# EAGLE board XBee-Explorer-Dongle-GiantPanel-v22 (EAGLE 6.5.0), part 1 of 4
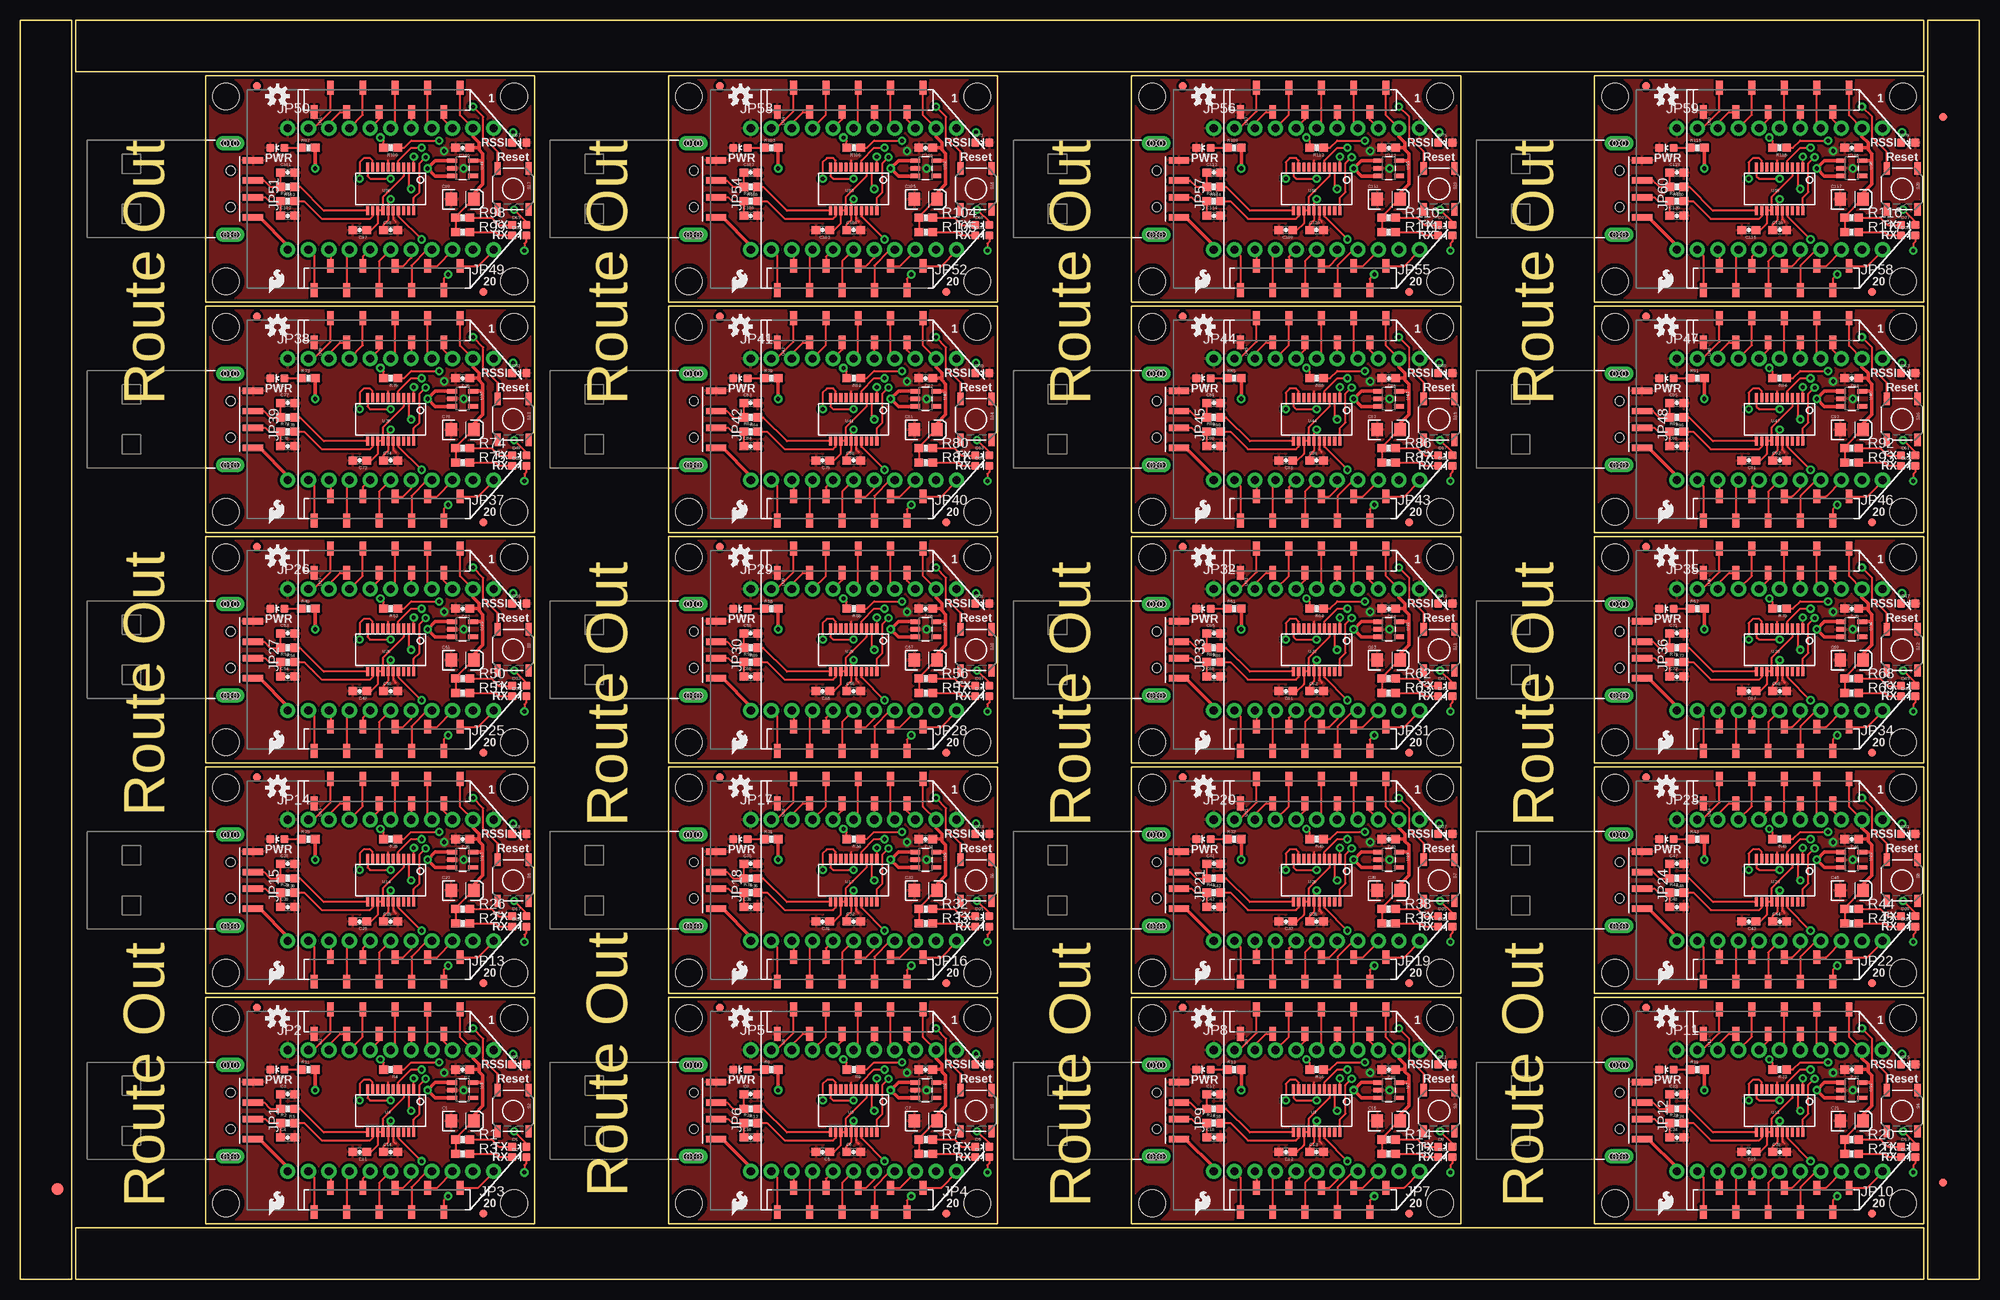
[diagram p0: board, top side]
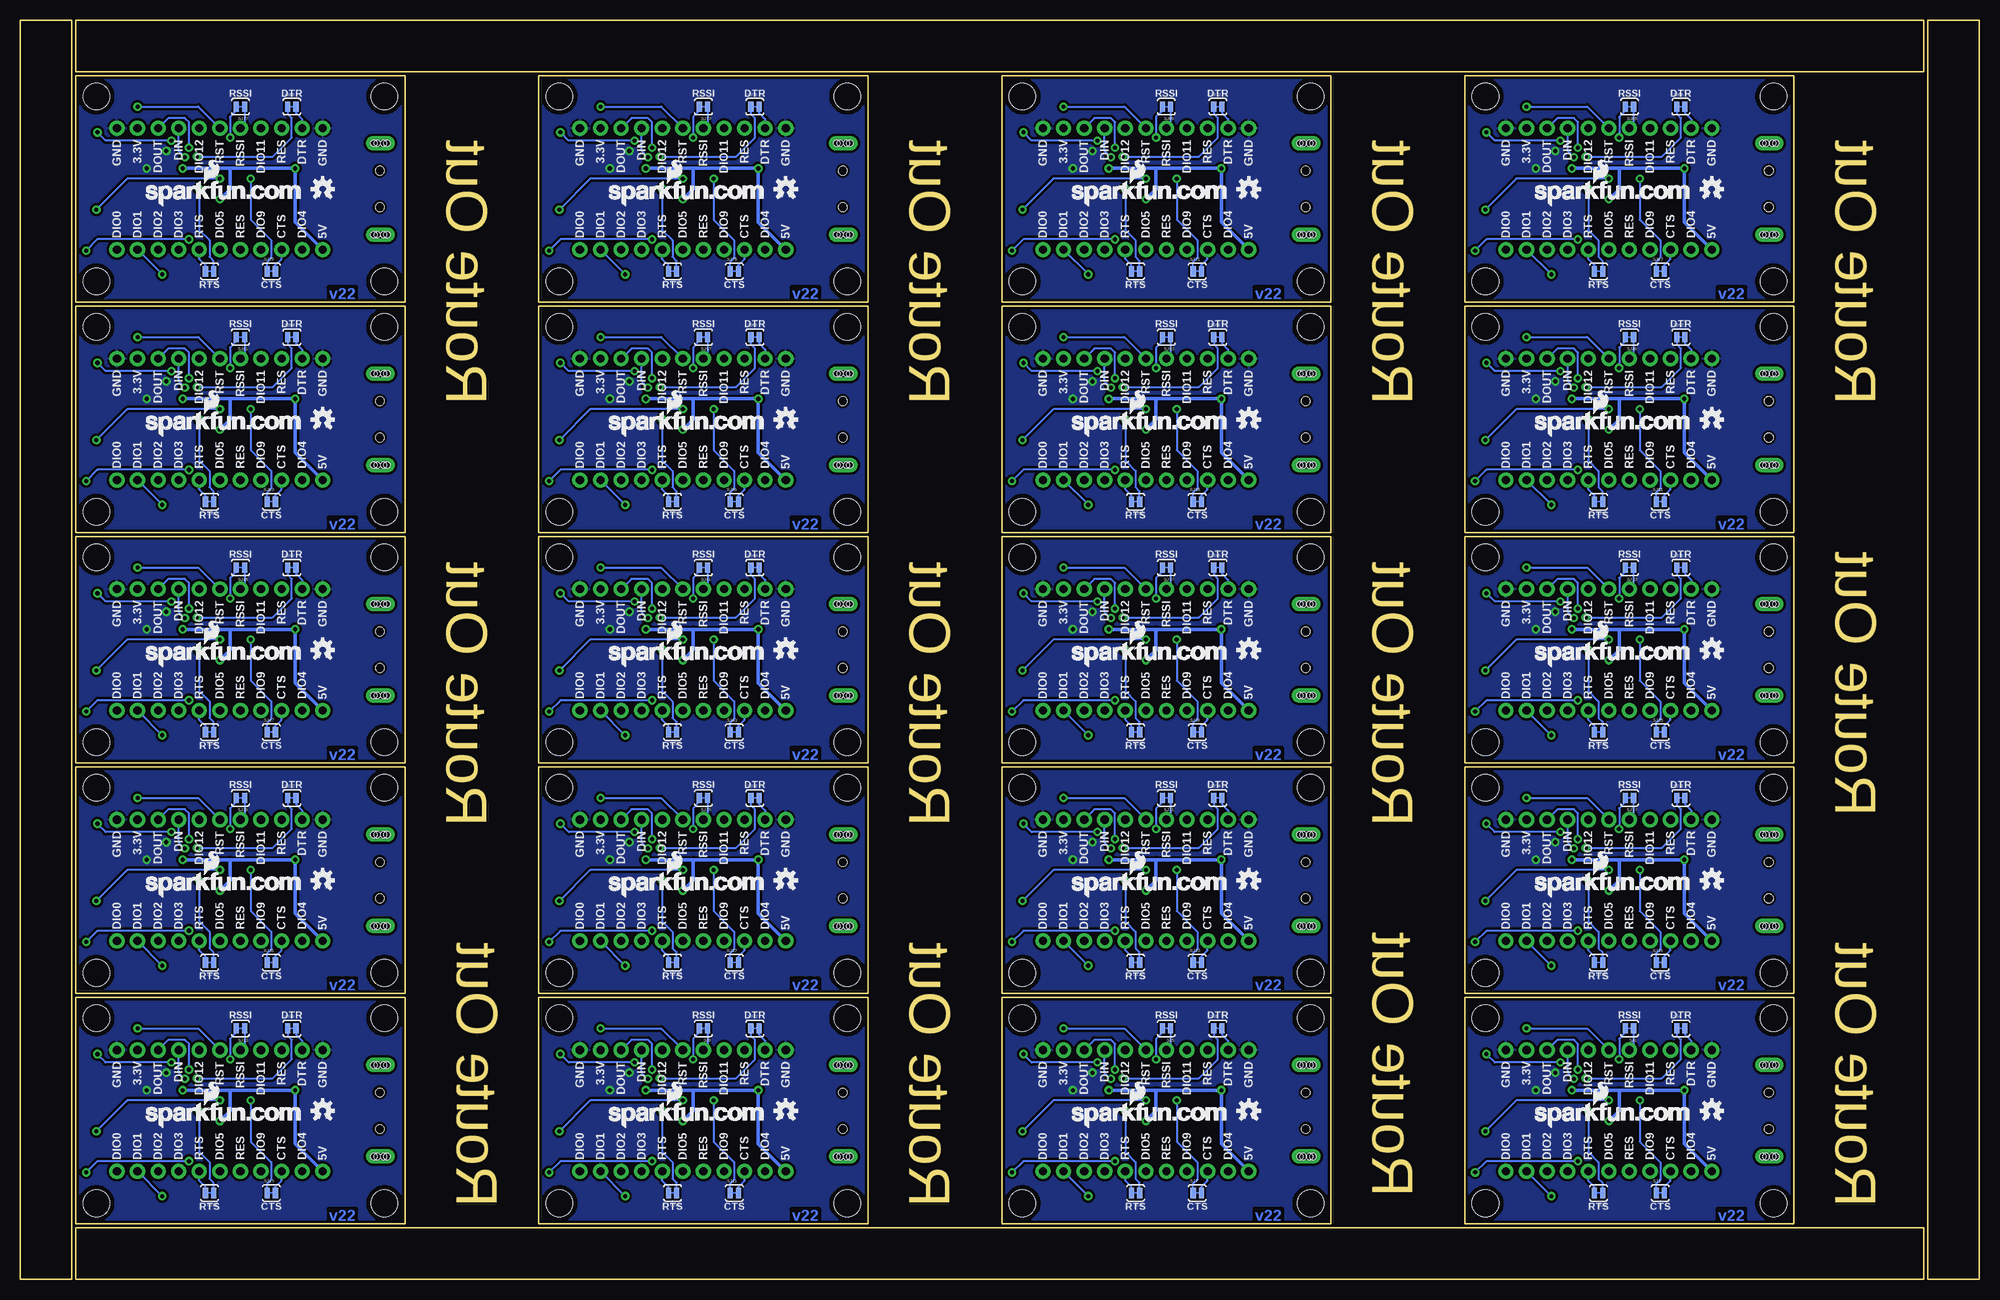
[diagram p1: board, bottom side, seen from below]

Size 241.81 x 155.45 mm. Coordinates in mm from the lower left corner, seen from the top.
Outline: 63.5,6.86 63.5,34.8 22.86,34.8 22.86,6.86 63.5,6.86
Outline: 120.65,6.86 120.65,34.8 80.01,34.8 80.01,6.86 120.65,6.86
Outline: 177.8,6.86 177.8,34.8 137.16,34.8 137.16,6.86 177.8,6.86
Outline: 234.95,6.86 234.95,34.8 194.31,34.8 194.31,6.86 234.95,6.86
Outline: 63.5,35.31 63.5,63.25 22.86,63.25 22.86,35.31 63.5,35.31
Outline: 120.65,35.31 120.65,63.25 80.01,63.25 80.01,35.31 120.65,35.31
Outline: 177.8,35.31 177.8,63.25 137.16,63.25 137.16,35.31 177.8,35.31
Outline: 234.95,35.31 234.95,63.25 194.31,63.25 194.31,35.31 234.95,35.31
Outline: 63.5,63.75 63.5,91.69 22.86,91.69 22.86,63.75 63.5,63.75
Outline: 120.65,63.75 120.65,91.69 80.01,91.69 80.01,63.75 120.65,63.75
Outline: 177.8,63.75 177.8,91.69 137.16,91.69 137.16,63.75 177.8,63.75
Outline: 234.95,63.75 234.95,91.69 194.31,91.69 194.31,63.75 234.95,63.75
Outline: 63.5,92.2 63.5,120.14 22.86,120.14 22.86,92.2 63.5,92.2
Outline: 120.65,92.2 120.65,120.14 80.01,120.14 80.01,92.2 120.65,92.2
Outline: 177.8,92.2 177.8,120.14 137.16,120.14 137.16,92.2 177.8,92.2
Outline: 234.95,92.2 234.95,120.14 194.31,120.14 194.31,92.2 234.95,92.2
Outline: 63.5,120.65 63.5,148.59 22.86,148.59 22.86,120.65 63.5,120.65
Outline: 120.65,120.65 120.65,148.59 80.01,148.59 80.01,120.65 120.65,120.65
Outline: 177.8,120.65 177.8,148.59 137.16,148.59 137.16,120.65 177.8,120.65
Outline: 234.95,120.65 234.95,148.59 194.31,148.59 194.31,120.65 234.95,120.65
Outline: 6.35,0 6.35,155.45 0,155.45 0,0 6.35,0
Outline: 6.86,149.1 234.95,149.1 234.95,155.45 6.86,155.45 6.86,149.1
Outline: 6.86,6.35 6.86,0 234.95,0 234.95,6.35 6.86,6.35
Outline: 235.46,0 241.81,0 241.81,155.45 235.46,155.45 235.46,0
Copper layers (1*16): Top 0.035mm / dielectric 1.5mm / Bottom 0.035mm
Design rules "SparkFun-2-layer": minimum track width 7mil, minimum drill 15mil, track to track 8mil, track to pad 8mil, pad to pad 8mil, via to via 8mil, smd to smd 8mil, copper to edge 8mil, drill to drill 8mil, minimum pad ring 12mil, minimum via ring 10mil, stop-mask expansion 4mil, vias tented up to drill 20mil, thermal gap 10mil
Net classes: 0 default: width 0.203 mm; 1 vcc: width 0.254 mm; 2 gnd: width 0.254 mm

## Footprints (pad centres in the part's own frame; a part is rotated, then mirrored left to right if it is on the bottom)
EIA3216 = smd 1.4 x 1.6: A 1.4,0; C -1.4,0
0603-CAP = smd 1.1 x 1: 1 -0.85,0; 2 0.85,0
LED-0603 = smd 1 x 1: A 0,-0.877; C 0,0.877
FIDUCIAL-1.5X3 = smd 1.5 x 1.5: 1 0,0
FIDUCIAL-1X2 = smd 1 x 1: 1 0,0
USB-A-SMT-MALE-LOCKING = smd 0.8 x 2.5: D+1 1.027,-5.87; D-1 -1.027,-5.87; GND1 3.551,-5.87; VBUS1 -3.5,-5.87 | drill 0.8 pad 1.778 long: P$1 5.647,-3.05; P$3 -5.647,-3.05 | hole 1.1: 2.25,-3.12; -2.25,-3.12 | hole 0.8: -5.647,-3.45; -5.647,-3.85; -5.647,-2.65; -5.647,-2.25; 5.647,-3.45; 5.647,-3.85; 5.647,-2.65; 5.647,-2.25
1X11_NO_SILK = drill 1.016 pad 1.88: 1 0,0; 2 2.54,0; 3 5.08,0; 4 7.62,0; 5 10.16,0; 6 12.7,0; 7 15.24,0; 8 17.78,0; 9 20.32,0; 10 22.86,0; 11 25.4,0
0603-RES = smd 1.1 x 1: 1 -0.85,0; 2 0.85,0
TACTILE_SWITCH_SMD = smd 1.524 x 0.762: 1 -2.54,1.905; 2 2.54,1.905; 3 -2.54,-1.905; 4 2.54,-1.905
SJ_2S-TRACE = smd 0.635 x 1.27: 1 -0.508,0; 2 0.508,0
SOT23-5 = smd 0.55 x 1.2: 1 -0.95,-1.3; 2 0,-1.3; 3 0.95,-1.3; 4 0.95,1.3; 5 -0.95,1.3
XBEE-SMD = smd 1.7 x 0.85: 1 -12.5,20; 2 -9.5,18; 3 -12.5,16; 4 -9.5,14; 5 -12.5,12; 6 -9.5,10; 7 -12.5,8; 8 -9.5,6; 9 -12.5,4; 10 -9.5,2; 11 12.5,2; 12 9.5,4; 13 12.5,6; 14 9.5,8; 15 12.5,10; 16 9.5,12; 17 12.5,14; 18 9.5,16; 19 12.5,18; 20 9.5,20
SSOP20_L = smd 0.381 x 1.143: 1 -2.857,-2.68; 2 -2.223,-2.68; 3 -1.587,-2.68; 4 -0.953,-2.68; 5 -0.318,-2.68; 6 0.318,-2.68; 7 0.953,-2.68; 8 1.587,-2.68; 9 2.223,-2.68; 10 2.857,-2.68; 11 2.857,2.68; 12 2.223,2.68; 13 1.587,2.68; 14 0.953,2.68; 15 0.318,2.68; 16 -0.318,2.68; 17 -0.953,2.68; 18 -1.587,2.68; 19 -2.223,2.68; 20 -2.857,2.68
STAND-OFF = hole 3.302: 0,0

## Placement (x,y rotation side)
C1  10uF  [EIA3216]  54.61,19.56 0 top
C2  0.1uF  [0603-CAP]  54.61,25.91 180 top
C3  47pF  [0603-CAP]  33.02,22.86 0 top
C4  47pF  [0603-CAP]  33.02,17.53 0 top
C5  0.1uF  [0603-CAP]  99.06,15.75 180 top
C6  0.1uF  [0603-CAP]  102.87,15.75 0 top
C7  10uF  [EIA3216]  111.76,19.56 0 top
C8  0.1uF  [0603-CAP]  111.76,25.91 180 top
C9  47pF  [0603-CAP]  90.17,22.86 0 top
C10  47pF  [0603-CAP]  90.17,17.53 0 top
C11  0.1uF  [0603-CAP]  41.91,15.75 180 top
C12  0.1uF  [0603-CAP]  156.21,15.75 180 top
C13  0.1uF  [0603-CAP]  160.02,15.75 0 top
C14  0.1uF  [0603-CAP]  45.72,15.75 0 top
C15  10uF  [EIA3216]  168.91,19.56 0 top
C16  0.1uF  [0603-CAP]  168.91,25.91 180 top
C17  47pF  [0603-CAP]  147.32,22.86 0 top
C18  47pF  [0603-CAP]  147.32,17.53 0 top
C19  0.1uF  [0603-CAP]  213.36,15.75 180 top
C20  0.1uF  [0603-CAP]  217.17,15.75 0 top
C21  10uF  [EIA3216]  226.06,19.56 0 top
C22  0.1uF  [0603-CAP]  226.06,25.91 180 top
C23  47pF  [0603-CAP]  204.47,22.86 0 top
C24  47pF  [0603-CAP]  204.47,17.53 0 top
C25  0.1uF  [0603-CAP]  41.91,44.2 180 top
C26  0.1uF  [0603-CAP]  45.72,44.2 0 top
C27  10uF  [EIA3216]  54.61,48.01 0 top
C28  0.1uF  [0603-CAP]  54.61,54.36 180 top
C29  47pF  [0603-CAP]  33.02,51.31 0 top
C30  47pF  [0603-CAP]  33.02,45.97 0 top
C31  0.1uF  [0603-CAP]  99.06,44.2 180 top
C32  0.1uF  [0603-CAP]  102.87,44.2 0 top
C33  10uF  [EIA3216]  111.76,48.01 0 top
C34  0.1uF  [0603-CAP]  111.76,54.36 180 top
C35  47pF  [0603-CAP]  90.17,51.31 0 top
C36  47pF  [0603-CAP]  90.17,45.97 0 top
C37  0.1uF  [0603-CAP]  156.21,44.2 180 top
C38  0.1uF  [0603-CAP]  160.02,44.2 0 top
C39  10uF  [EIA3216]  168.91,48.01 0 top
C40  0.1uF  [0603-CAP]  168.91,54.36 180 top
C41  47pF  [0603-CAP]  147.32,51.31 0 top
C42  47pF  [0603-CAP]  147.32,45.97 0 top
C43  0.1uF  [0603-CAP]  213.36,44.2 180 top
C44  0.1uF  [0603-CAP]  217.17,44.2 0 top
C45  10uF  [EIA3216]  226.06,48.01 0 top
C46  0.1uF  [0603-CAP]  226.06,54.36 180 top
C47  47pF  [0603-CAP]  204.47,51.31 0 top
C48  47pF  [0603-CAP]  204.47,45.97 0 top
C49  0.1uF  [0603-CAP]  41.91,72.64 180 top
C50  0.1uF  [0603-CAP]  45.72,72.64 0 top
C51  10uF  [EIA3216]  54.61,76.45 0 top
C52  0.1uF  [0603-CAP]  54.61,82.8 180 top
C53  47pF  [0603-CAP]  33.02,79.76 0 top
C54  47pF  [0603-CAP]  33.02,74.42 0 top
C55  0.1uF  [0603-CAP]  99.06,72.64 180 top
C56  0.1uF  [0603-CAP]  102.87,72.64 0 top
C57  10uF  [EIA3216]  111.76,76.45 0 top
C58  0.1uF  [0603-CAP]  111.76,82.8 180 top
C59  47pF  [0603-CAP]  90.17,79.76 0 top
C60  47pF  [0603-CAP]  90.17,74.42 0 top
C61  0.1uF  [0603-CAP]  156.21,72.64 180 top
C62  0.1uF  [0603-CAP]  160.02,72.64 0 top
C63  10uF  [EIA3216]  168.91,76.45 0 top
C64  0.1uF  [0603-CAP]  168.91,82.8 180 top
C65  47pF  [0603-CAP]  147.32,79.76 0 top
C66  47pF  [0603-CAP]  147.32,74.42 0 top
C67  0.1uF  [0603-CAP]  213.36,72.64 180 top
C68  0.1uF  [0603-CAP]  217.17,72.64 0 top
C69  10uF  [EIA3216]  226.06,76.45 0 top
C70  0.1uF  [0603-CAP]  226.06,82.8 180 top
C71  47pF  [0603-CAP]  204.47,79.76 0 top
C72  47pF  [0603-CAP]  204.47,74.42 0 top
C73  0.1uF  [0603-CAP]  41.91,101.09 180 top
C74  0.1uF  [0603-CAP]  45.72,101.09 0 top
C75  10uF  [EIA3216]  54.61,104.9 0 top
C76  0.1uF  [0603-CAP]  54.61,111.25 180 top
C77  47pF  [0603-CAP]  33.02,108.2 0 top
C78  47pF  [0603-CAP]  33.02,102.87 0 top
C79  0.1uF  [0603-CAP]  99.06,101.09 180 top
C80  0.1uF  [0603-CAP]  102.87,101.09 0 top
C81  10uF  [EIA3216]  111.76,104.9 0 top
C82  0.1uF  [0603-CAP]  111.76,111.25 180 top
C83  47pF  [0603-CAP]  90.17,108.2 0 top
C84  47pF  [0603-CAP]  90.17,102.87 0 top
C85  0.1uF  [0603-CAP]  156.21,101.09 180 top
C86  0.1uF  [0603-CAP]  160.02,101.09 0 top
C87  10uF  [EIA3216]  168.91,104.9 0 top
C88  0.1uF  [0603-CAP]  168.91,111.25 180 top
C89  47pF  [0603-CAP]  147.32,108.2 0 top
C90  47pF  [0603-CAP]  147.32,102.87 0 top
C91  0.1uF  [0603-CAP]  213.36,101.09 180 top
C92  0.1uF  [0603-CAP]  217.17,101.09 0 top
C93  10uF  [EIA3216]  226.06,104.9 0 top
C94  0.1uF  [0603-CAP]  226.06,111.25 180 top
C95  47pF  [0603-CAP]  204.47,108.2 0 top
C96  47pF  [0603-CAP]  204.47,102.87 0 top
C97  0.1uF  [0603-CAP]  41.91,129.54 180 top
C98  0.1uF  [0603-CAP]  45.72,129.54 0 top
C99  10uF  [EIA3216]  54.61,133.35 0 top
C100  0.1uF  [0603-CAP]  54.61,139.7 180 top
C101  47pF  [0603-CAP]  33.02,136.65 0 top
C102  47pF  [0603-CAP]  33.02,131.32 0 top
C103  0.1uF  [0603-CAP]  99.06,129.54 180 top
C104  0.1uF  [0603-CAP]  102.87,129.54 0 top
C105  10uF  [EIA3216]  111.76,133.35 0 top
C106  0.1uF  [0603-CAP]  111.76,139.7 180 top
C107  47pF  [0603-CAP]  90.17,136.65 0 top
C108  47pF  [0603-CAP]  90.17,131.32 0 top
C109  0.1uF  [0603-CAP]  156.21,129.54 180 top
C110  0.1uF  [0603-CAP]  160.02,129.54 0 top
C111  10uF  [EIA3216]  168.91,133.35 0 top
C112  0.1uF  [0603-CAP]  168.91,139.7 180 top
C113  47pF  [0603-CAP]  147.32,136.65 0 top
C114  47pF  [0603-CAP]  147.32,131.32 0 top
C115  0.1uF  [0603-CAP]  213.36,129.54 180 top
C116  0.1uF  [0603-CAP]  217.17,129.54 0 top
C117  10uF  [EIA3216]  226.06,133.35 0 top
C118  0.1uF  [0603-CAP]  226.06,139.7 180 top
C119  47pF  [0603-CAP]  204.47,136.65 0 top
C120  47pF  [0603-CAP]  204.47,131.32 0 top
D1  RED  [LED-0603]  61.59,16.38 270 top
D2  GREEN  [LED-0603]  61.59,15.11 270 top
D3  GREEN  [LED-0603]  61.59,26.54 270 top
D4  RED  [LED-0603]  31.75,25.91 90 top
D5  RED  [LED-0603]  118.75,16.38 270 top
D6  GREEN  [LED-0603]  118.75,15.11 270 top
D7  GREEN  [LED-0603]  118.75,26.54 270 top
D8  RED  [LED-0603]  88.9,25.91 90 top
D9  RED  [LED-0603]  175.9,16.38 270 top
D10  GREEN  [LED-0603]  175.9,15.11 270 top
D11  GREEN  [LED-0603]  175.9,26.54 270 top
D12  RED  [LED-0603]  146.05,25.91 90 top
D13  RED  [LED-0603]  233.04,16.38 270 top
D14  GREEN  [LED-0603]  233.04,15.11 270 top
D15  GREEN  [LED-0603]  233.04,26.54 270 top
D16  RED  [LED-0603]  203.2,25.91 90 top
D17  RED  [LED-0603]  61.59,44.83 270 top
D18  GREEN  [LED-0603]  61.59,43.56 270 top
D19  GREEN  [LED-0603]  61.59,54.99 270 top
D20  RED  [LED-0603]  31.75,54.36 90 top
D21  RED  [LED-0603]  118.75,44.83 270 top
D22  GREEN  [LED-0603]  118.75,43.56 270 top
D23  GREEN  [LED-0603]  118.75,54.99 270 top
D24  RED  [LED-0603]  88.9,54.36 90 top
D25  RED  [LED-0603]  175.9,44.83 270 top
D26  GREEN  [LED-0603]  175.9,43.56 270 top
D27  GREEN  [LED-0603]  175.9,54.99 270 top
D28  RED  [LED-0603]  146.05,54.36 90 top
D29  RED  [LED-0603]  233.04,44.83 270 top
D30  GREEN  [LED-0603]  233.04,43.56 270 top
D31  GREEN  [LED-0603]  233.04,54.99 270 top
D32  RED  [LED-0603]  203.2,54.36 90 top
D33  RED  [LED-0603]  61.59,73.28 270 top
D34  GREEN  [LED-0603]  61.59,72.01 270 top
D35  GREEN  [LED-0603]  61.59,83.44 270 top
D36  RED  [LED-0603]  31.75,82.8 90 top
D37  RED  [LED-0603]  118.75,73.28 270 top
D38  GREEN  [LED-0603]  118.75,72.01 270 top
D39  GREEN  [LED-0603]  118.75,83.44 270 top
D40  RED  [LED-0603]  88.9,82.8 90 top
D41  RED  [LED-0603]  175.9,73.28 270 top
D42  GREEN  [LED-0603]  175.9,72.01 270 top
D43  GREEN  [LED-0603]  175.9,83.44 270 top
D44  RED  [LED-0603]  146.05,82.8 90 top
D45  RED  [LED-0603]  233.04,73.28 270 top
D46  GREEN  [LED-0603]  233.04,72.01 270 top
D47  GREEN  [LED-0603]  233.04,83.44 270 top
D48  RED  [LED-0603]  203.2,82.8 90 top
D49  RED  [LED-0603]  61.59,101.73 270 top
D50  GREEN  [LED-0603]  61.59,100.46 270 top
D51  GREEN  [LED-0603]  61.59,111.89 270 top
D52  RED  [LED-0603]  31.75,111.25 90 top
D53  RED  [LED-0603]  118.75,101.73 270 top
D54  GREEN  [LED-0603]  118.75,100.46 270 top
D55  GREEN  [LED-0603]  118.75,111.89 270 top
D56  RED  [LED-0603]  88.9,111.25 90 top
D57  RED  [LED-0603]  175.9,101.73 270 top
D58  GREEN  [LED-0603]  175.9,100.46 270 top
D59  GREEN  [LED-0603]  175.9,111.89 270 top
D60  RED  [LED-0603]  146.05,111.25 90 top
D61  RED  [LED-0603]  233.04,101.73 270 top
D62  GREEN  [LED-0603]  233.04,100.46 270 top
D63  GREEN  [LED-0603]  233.04,111.89 270 top
D64  RED  [LED-0603]  203.2,111.25 90 top
D65  RED  [LED-0603]  61.59,130.18 270 top
D66  GREEN  [LED-0603]  61.59,128.91 270 top
D67  GREEN  [LED-0603]  61.59,140.34 270 top
D68  RED  [LED-0603]  31.75,139.7 90 top
D69  RED  [LED-0603]  118.75,130.18 270 top
D70  GREEN  [LED-0603]  118.75,128.91 270 top
D71  GREEN  [LED-0603]  118.75,140.34 270 top
D72  RED  [LED-0603]  88.9,139.7 90 top
D73  RED  [LED-0603]  175.9,130.18 270 top
D74  GREEN  [LED-0603]  175.9,128.91 270 top
D75  GREEN  [LED-0603]  175.9,140.34 270 top
D76  RED  [LED-0603]  146.05,139.7 90 top
D77  RED  [LED-0603]  233.04,130.18 270 top
D78  GREEN  [LED-0603]  233.04,128.91 270 top
D79  GREEN  [LED-0603]  233.04,140.34 270 top
D80  RED  [LED-0603]  203.2,139.7 90 top
E$1  [FIDUCIAL-1.5X3]  4.57,11.18 0 top
E$6  [FIDUCIAL-1X2]  237.36,11.94 0 top
E$8  [FIDUCIAL-1X2]  237.36,143.51 180 top
FID1  FIDUCIAL1X2  [FIDUCIAL-1X2]  29.21,33.53 0 top
FID2  FIDUCIAL1X2  [FIDUCIAL-1X2]  57.15,8.13 0 top
FID3  FIDUCIAL1X2  [FIDUCIAL-1X2]  86.36,33.53 0 top
FID4  FIDUCIAL1X2  [FIDUCIAL-1X2]  114.3,8.13 0 top
FID5  FIDUCIAL1X2  [FIDUCIAL-1X2]  143.51,33.53 0 top
FID6  FIDUCIAL1X2  [FIDUCIAL-1X2]  171.45,8.13 0 top
FID7  FIDUCIAL1X2  [FIDUCIAL-1X2]  200.66,33.53 0 top
FID8  FIDUCIAL1X2  [FIDUCIAL-1X2]  228.6,8.13 0 top
FID9  FIDUCIAL1X2  [FIDUCIAL-1X2]  29.21,61.98 0 top
FID10  FIDUCIAL1X2  [FIDUCIAL-1X2]  57.15,36.58 0 top
FID11  FIDUCIAL1X2  [FIDUCIAL-1X2]  86.36,61.98 0 top
FID12  FIDUCIAL1X2  [FIDUCIAL-1X2]  114.3,36.58 0 top
FID13  FIDUCIAL1X2  [FIDUCIAL-1X2]  143.51,61.98 0 top
FID14  FIDUCIAL1X2  [FIDUCIAL-1X2]  171.45,36.58 0 top
FID15  FIDUCIAL1X2  [FIDUCIAL-1X2]  200.66,61.98 0 top
FID16  FIDUCIAL1X2  [FIDUCIAL-1X2]  228.6,36.58 0 top
FID17  FIDUCIAL1X2  [FIDUCIAL-1X2]  29.21,90.42 0 top
FID18  FIDUCIAL1X2  [FIDUCIAL-1X2]  57.15,65.02 0 top
FID19  FIDUCIAL1X2  [FIDUCIAL-1X2]  86.36,90.42 0 top
FID20  FIDUCIAL1X2  [FIDUCIAL-1X2]  114.3,65.02 0 top
FID21  FIDUCIAL1X2  [FIDUCIAL-1X2]  143.51,90.42 0 top
FID22  FIDUCIAL1X2  [FIDUCIAL-1X2]  171.45,65.02 0 top
FID23  FIDUCIAL1X2  [FIDUCIAL-1X2]  200.66,90.42 0 top
FID24  FIDUCIAL1X2  [FIDUCIAL-1X2]  228.6,65.02 0 top
FID25  FIDUCIAL1X2  [FIDUCIAL-1X2]  29.21,118.87 0 top
FID26  FIDUCIAL1X2  [FIDUCIAL-1X2]  57.15,93.47 0 top
FID27  FIDUCIAL1X2  [FIDUCIAL-1X2]  86.36,118.87 0 top
FID28  FIDUCIAL1X2  [FIDUCIAL-1X2]  114.3,93.47 0 top
FID29  FIDUCIAL1X2  [FIDUCIAL-1X2]  143.51,118.87 0 top
FID30  FIDUCIAL1X2  [FIDUCIAL-1X2]  171.45,93.47 0 top
FID31  FIDUCIAL1X2  [FIDUCIAL-1X2]  200.66,118.87 0 top
FID32  FIDUCIAL1X2  [FIDUCIAL-1X2]  228.6,93.47 0 top
FID33  FIDUCIAL1X2  [FIDUCIAL-1X2]  29.21,147.32 0 top
FID34  FIDUCIAL1X2  [FIDUCIAL-1X2]  57.15,121.92 0 top
FID35  FIDUCIAL1X2  [FIDUCIAL-1X2]  86.36,147.32 0 top
FID36  FIDUCIAL1X2  [FIDUCIAL-1X2]  114.3,121.92 0 top
FID37  FIDUCIAL1X2  [FIDUCIAL-1X2]  143.51,147.32 0 top
FID38  FIDUCIAL1X2  [FIDUCIAL-1X2]  171.45,121.92 0 top
FID39  FIDUCIAL1X2  [FIDUCIAL-1X2]  200.66,147.32 0 top
FID40  FIDUCIAL1X2  [FIDUCIAL-1X2]  228.6,121.92 0 top
JP1  USBA-SMD-MALE-LOCKING  [USB-A-SMT-MALE-LOCKING]  22.86,20.83 90 top
JP2  M111X11_NO_SILK  [1X11_NO_SILK]  33.02,28.32 0 top
JP3  M111X11_NO_SILK  [1X11_NO_SILK]  58.42,13.34 180 top
JP4  M111X11_NO_SILK  [1X11_NO_SILK]  115.57,13.34 180 top
JP5  M111X11_NO_SILK  [1X11_NO_SILK]  90.17,28.32 0 top
JP6  USBA-SMD-MALE-LOCKING  [USB-A-SMT-MALE-LOCKING]  80.01,20.83 90 top
JP7  M111X11_NO_SILK  [1X11_NO_SILK]  172.72,13.34 180 top
JP8  M111X11_NO_SILK  [1X11_NO_SILK]  147.32,28.32 0 top
JP9  USBA-SMD-MALE-LOCKING  [USB-A-SMT-MALE-LOCKING]  137.16,20.83 90 top
JP10  M111X11_NO_SILK  [1X11_NO_SILK]  229.87,13.34 180 top
JP11  M111X11_NO_SILK  [1X11_NO_SILK]  204.47,28.32 0 top
JP12  USBA-SMD-MALE-LOCKING  [USB-A-SMT-MALE-LOCKING]  194.31,20.83 90 top
JP13  M111X11_NO_SILK  [1X11_NO_SILK]  58.42,41.78 180 top
JP14  M111X11_NO_SILK  [1X11_NO_SILK]  33.02,56.77 0 top
JP15  USBA-SMD-MALE-LOCKING  [USB-A-SMT-MALE-LOCKING]  22.86,49.28 90 top
JP16  M111X11_NO_SILK  [1X11_NO_SILK]  115.57,41.78 180 top
JP17  M111X11_NO_SILK  [1X11_NO_SILK]  90.17,56.77 0 top
JP18  USBA-SMD-MALE-LOCKING  [USB-A-SMT-MALE-LOCKING]  80.01,49.28 90 top
JP19  M111X11_NO_SILK  [1X11_NO_SILK]  172.72,41.78 180 top
JP20  M111X11_NO_SILK  [1X11_NO_SILK]  147.32,56.77 0 top
JP21  USBA-SMD-MALE-LOCKING  [USB-A-SMT-MALE-LOCKING]  137.16,49.28 90 top
JP22  M111X11_NO_SILK  [1X11_NO_SILK]  229.87,41.78 180 top
JP23  M111X11_NO_SILK  [1X11_NO_SILK]  204.47,56.77 0 top
JP24  USBA-SMD-MALE-LOCKING  [USB-A-SMT-MALE-LOCKING]  194.31,49.28 90 top
JP25  M111X11_NO_SILK  [1X11_NO_SILK]  58.42,70.23 180 top
JP26  M111X11_NO_SILK  [1X11_NO_SILK]  33.02,85.22 0 top
JP27  USBA-SMD-MALE-LOCKING  [USB-A-SMT-MALE-LOCKING]  22.86,77.72 90 top
JP28  M111X11_NO_SILK  [1X11_NO_SILK]  115.57,70.23 180 top
JP29  M111X11_NO_SILK  [1X11_NO_SILK]  90.17,85.22 0 top
JP30  USBA-SMD-MALE-LOCKING  [USB-A-SMT-MALE-LOCKING]  80.01,77.72 90 top
JP31  M111X11_NO_SILK  [1X11_NO_SILK]  172.72,70.23 180 top
JP32  M111X11_NO_SILK  [1X11_NO_SILK]  147.32,85.22 0 top
JP33  USBA-SMD-MALE-LOCKING  [USB-A-SMT-MALE-LOCKING]  137.16,77.72 90 top
JP34  M111X11_NO_SILK  [1X11_NO_SILK]  229.87,70.23 180 top
JP35  M111X11_NO_SILK  [1X11_NO_SILK]  204.47,85.22 0 top
JP36  USBA-SMD-MALE-LOCKING  [USB-A-SMT-MALE-LOCKING]  194.31,77.72 90 top
JP37  M111X11_NO_SILK  [1X11_NO_SILK]  58.42,98.68 180 top
JP38  M111X11_NO_SILK  [1X11_NO_SILK]  33.02,113.67 0 top
JP39  USBA-SMD-MALE-LOCKING  [USB-A-SMT-MALE-LOCKING]  22.86,106.17 90 top
JP40  M111X11_NO_SILK  [1X11_NO_SILK]  115.57,98.68 180 top
JP41  M111X11_NO_SILK  [1X11_NO_SILK]  90.17,113.67 0 top
JP42  USBA-SMD-MALE-LOCKING  [USB-A-SMT-MALE-LOCKING]  80.01,106.17 90 top
JP43  M111X11_NO_SILK  [1X11_NO_SILK]  172.72,98.68 180 top
JP44  M111X11_NO_SILK  [1X11_NO_SILK]  147.32,113.67 0 top
JP45  USBA-SMD-MALE-LOCKING  [USB-A-SMT-MALE-LOCKING]  137.16,106.17 90 top
JP46  M111X11_NO_SILK  [1X11_NO_SILK]  229.87,98.68 180 top
JP47  M111X11_NO_SILK  [1X11_NO_SILK]  204.47,113.67 0 top
JP48  USBA-SMD-MALE-LOCKING  [USB-A-SMT-MALE-LOCKING]  194.31,106.17 90 top
JP49  M111X11_NO_SILK  [1X11_NO_SILK]  58.42,127.13 180 top
JP50  M111X11_NO_SILK  [1X11_NO_SILK]  33.02,142.11 0 top
JP51  USBA-SMD-MALE-LOCKING  [USB-A-SMT-MALE-LOCKING]  22.86,134.62 90 top
JP52  M111X11_NO_SILK  [1X11_NO_SILK]  115.57,127.13 180 top
JP53  M111X11_NO_SILK  [1X11_NO_SILK]  90.17,142.11 0 top
JP54  USBA-SMD-MALE-LOCKING  [USB-A-SMT-MALE-LOCKING]  80.01,134.62 90 top
JP55  M111X11_NO_SILK  [1X11_NO_SILK]  172.72,127.13 180 top
JP56  M111X11_NO_SILK  [1X11_NO_SILK]  147.32,142.11 0 top
JP57  USBA-SMD-MALE-LOCKING  [USB-A-SMT-MALE-LOCKING]  137.16,134.62 90 top
JP58  M111X11_NO_SILK  [1X11_NO_SILK]  229.87,127.13 180 top
JP59  M111X11_NO_SILK  [1X11_NO_SILK]  204.47,142.11 0 top
JP60  USBA-SMD-MALE-LOCKING  [USB-A-SMT-MALE-LOCKING]  194.31,134.62 90 top
R1  1K  [0603-RES]  54.61,17.27 0 top
R2  27  [0603-RES]  33.02,19.3 0 top
R3  1K  [0603-RES]  54.61,15.49 0 top
R4  330  [0603-RES]  45.72,25.91 180 top
R5  27  [0603-RES]  33.02,21.08 180 top
R6  1K  [0603-RES]  92.71,25.91 0 top
R7  1K  [0603-RES]  111.76,17.27 0 top
R8  1K  [0603-RES]  111.76,15.49 0 top
R9  330  [0603-RES]  102.87,25.91 180 top
R10  27  [0603-RES]  90.17,19.3 0 top
R11  1K  [0603-RES]  35.56,25.91 0 top
R12  27  [0603-RES]  90.17,21.08 180 top
R13  1K  [0603-RES]  149.86,25.91 0 top
R14  1K  [0603-RES]  168.91,17.27 0 top
R15  1K  [0603-RES]  168.91,15.49 0 top
R16  330  [0603-RES]  160.02,25.91 180 top
R17  27  [0603-RES]  147.32,19.3 0 top
R18  27  [0603-RES]  147.32,21.08 180 top
R19  1K  [0603-RES]  207.01,25.91 0 top
R20  1K  [0603-RES]  226.06,17.27 0 top
R21  1K  [0603-RES]  226.06,15.49 0 top
R22  330  [0603-RES]  217.17,25.91 180 top
R23  27  [0603-RES]  204.47,19.3 0 top
R24  27  [0603-RES]  204.47,21.08 180 top
R25  1K  [0603-RES]  35.56,54.36 0 top
R26  1K  [0603-RES]  54.61,45.72 0 top
R27  1K  [0603-RES]  54.61,43.94 0 top
R28  330  [0603-RES]  45.72,54.36 180 top
R29  27  [0603-RES]  33.02,47.75 0 top
R30  27  [0603-RES]  33.02,49.53 180 top
R31  1K  [0603-RES]  92.71,54.36 0 top
R32  1K  [0603-RES]  111.76,45.72 0 top
R33  1K  [0603-RES]  111.76,43.94 0 top
R34  330  [0603-RES]  102.87,54.36 180 top
R35  27  [0603-RES]  90.17,47.75 0 top
R36  27  [0603-RES]  90.17,49.53 180 top
R37  1K  [0603-RES]  149.86,54.36 0 top
R38  1K  [0603-RES]  168.91,45.72 0 top
R39  1K  [0603-RES]  168.91,43.94 0 top
R40  330  [0603-RES]  160.02,54.36 180 top
R41  27  [0603-RES]  147.32,47.75 0 top
R42  27  [0603-RES]  147.32,49.53 180 top
R43  1K  [0603-RES]  207.01,54.36 0 top
R44  1K  [0603-RES]  226.06,45.72 0 top
R45  1K  [0603-RES]  226.06,43.94 0 top
R46  330  [0603-RES]  217.17,54.36 180 top
R47  27  [0603-RES]  204.47,47.75 0 top
R48  27  [0603-RES]  204.47,49.53 180 top
R49  1K  [0603-RES]  35.56,82.8 0 top
R50  1K  [0603-RES]  54.61,74.17 0 top
R51  1K  [0603-RES]  54.61,72.39 0 top
R52  330  [0603-RES]  45.72,82.8 180 top
R53  27  [0603-RES]  33.02,76.2 0 top
R54  27  [0603-RES]  33.02,77.98 180 top
R55  1K  [0603-RES]  92.71,82.8 0 top
R56  1K  [0603-RES]  111.76,74.17 0 top
R57  1K  [0603-RES]  111.76,72.39 0 top
R58  330  [0603-RES]  102.87,82.8 180 top
R59  27  [0603-RES]  90.17,76.2 0 top
R60  27  [0603-RES]  90.17,77.98 180 top
R61  1K  [0603-RES]  149.86,82.8 0 top
R62  1K  [0603-RES]  168.91,74.17 0 top
R63  1K  [0603-RES]  168.91,72.39 0 top
R64  330  [0603-RES]  160.02,82.8 180 top
R65  27  [0603-RES]  147.32,76.2 0 top
R66  27  [0603-RES]  147.32,77.98 180 top
R67  1K  [0603-RES]  207.01,82.8 0 top
R68  1K  [0603-RES]  226.06,74.17 0 top
R69  1K  [0603-RES]  226.06,72.39 0 top
R70  330  [0603-RES]  217.17,82.8 180 top
R71  27  [0603-RES]  204.47,76.2 0 top
R72  27  [0603-RES]  204.47,77.98 180 top
R73  1K  [0603-RES]  35.56,111.25 0 top
R74  1K  [0603-RES]  54.61,102.62 0 top
R75  1K  [0603-RES]  54.61,100.84 0 top
R76  330  [0603-RES]  45.72,111.25 180 top
R77  27  [0603-RES]  33.02,104.65 0 top
R78  27  [0603-RES]  33.02,106.43 180 top
R79  1K  [0603-RES]  92.71,111.25 0 top
R80  1K  [0603-RES]  111.76,102.62 0 top
R81  1K  [0603-RES]  111.76,100.84 0 top
R82  330  [0603-RES]  102.87,111.25 180 top
R83  27  [0603-RES]  90.17,104.65 0 top
R84  27  [0603-RES]  90.17,106.43 180 top
R85  1K  [0603-RES]  149.86,111.25 0 top
R86  1K  [0603-RES]  168.91,102.62 0 top
R87  1K  [0603-RES]  168.91,100.84 0 top
R88  330  [0603-RES]  160.02,111.25 180 top
R89  27  [0603-RES]  147.32,104.65 0 top
R90  27  [0603-RES]  147.32,106.43 180 top
R91  1K  [0603-RES]  207.01,111.25 0 top
R92  1K  [0603-RES]  226.06,102.62 0 top
R93  1K  [0603-RES]  226.06,100.84 0 top
R94  330  [0603-RES]  217.17,111.25 180 top
R95  27  [0603-RES]  204.47,104.65 0 top
R96  27  [0603-RES]  204.47,106.43 180 top
R97  1K  [0603-RES]  35.56,139.7 0 top
R98  1K  [0603-RES]  54.61,131.06 0 top
R99  1K  [0603-RES]  54.61,129.29 0 top
R100  330  [0603-RES]  45.72,139.7 180 top
R101  27  [0603-RES]  33.02,133.1 0 top
R102  27  [0603-RES]  33.02,134.87 180 top
R103  1K  [0603-RES]  92.71,139.7 0 top
R104  1K  [0603-RES]  111.76,131.06 0 top
R105  1K  [0603-RES]  111.76,129.29 0 top
R106  330  [0603-RES]  102.87,139.7 180 top
R107  27  [0603-RES]  90.17,133.1 0 top
R108  27  [0603-RES]  90.17,134.87 180 top
R109  1K  [0603-RES]  149.86,139.7 0 top
R110  1K  [0603-RES]  168.91,131.06 0 top
R111  1K  [0603-RES]  168.91,129.29 0 top
R112  330  [0603-RES]  160.02,139.7 180 top
R113  27  [0603-RES]  147.32,133.1 0 top
R114  27  [0603-RES]  147.32,134.87 180 top
R115  1K  [0603-RES]  207.01,139.7 0 top
R116  1K  [0603-RES]  226.06,131.06 0 top
R117  1K  [0603-RES]  226.06,129.29 0 top
R118  330  [0603-RES]  217.17,139.7 180 top
R119  27  [0603-RES]  204.47,133.1 0 top
R120  27  [0603-RES]  204.47,134.87 180 top
S1  Reset  [TACTILE_SWITCH_SMD]  117.98,20.83 270 top
S2  Reset  [TACTILE_SWITCH_SMD]  60.83,20.83 270 top
S3  Reset  [TACTILE_SWITCH_SMD]  175.13,20.83 270 top
S4  Reset  [TACTILE_SWITCH_SMD]  232.28,20.83 270 top
S5  Reset  [TACTILE_SWITCH_SMD]  60.83,49.28 270 top
S6  Reset  [TACTILE_SWITCH_SMD]  117.98,49.28 270 top
S7  Reset  [TACTILE_SWITCH_SMD]  175.13,49.28 270 top
S8  Reset  [TACTILE_SWITCH_SMD]  232.28,49.28 270 top
S9  Reset  [TACTILE_SWITCH_SMD]  60.83,77.72 270 top
S10  Reset  [TACTILE_SWITCH_SMD]  117.98,77.72 270 top
S11  Reset  [TACTILE_SWITCH_SMD]  175.13,77.72 270 top
S12  Reset  [TACTILE_SWITCH_SMD]  232.28,77.72 270 top
S13  Reset  [TACTILE_SWITCH_SMD]  60.83,106.17 270 top
S14  Reset  [TACTILE_SWITCH_SMD]  117.98,106.17 270 top
S15  Reset  [TACTILE_SWITCH_SMD]  175.13,106.17 270 top
S16  Reset  [TACTILE_SWITCH_SMD]  232.28,106.17 270 top
S17  Reset  [TACTILE_SWITCH_SMD]  60.83,134.62 270 top
S18  Reset  [TACTILE_SWITCH_SMD]  117.98,134.62 270 top
S19  Reset  [TACTILE_SWITCH_SMD]  175.13,134.62 270 top
S20  Reset  [TACTILE_SWITCH_SMD]  232.28,134.62 270 top
SJ1  RSSI  [SJ_2S-TRACE]  43.18,30.99 180 bottom
SJ2  RSSI  [SJ_2S-TRACE]  46.99,10.67 180 bottom
SJ3  RSSI  [SJ_2S-TRACE]  39.37,10.67 0 bottom
SJ4  RSSI  [SJ_2S-TRACE]  36.83,30.99 0 bottom
SJ5  RSSI  [SJ_2S-TRACE]  100.33,30.99 180 bottom
SJ6  RSSI  [SJ_2S-TRACE]  104.14,10.67 180 bottom
SJ7  RSSI  [SJ_2S-TRACE]  96.52,10.67 0 bottom
SJ8  RSSI  [SJ_2S-TRACE]  93.98,30.99 0 bottom
SJ9  RSSI  [SJ_2S-TRACE]  157.48,30.99 180 bottom
SJ10  RSSI  [SJ_2S-TRACE]  161.29,10.67 180 bottom
SJ11  RSSI  [SJ_2S-TRACE]  153.67,10.67 0 bottom
SJ12  RSSI  [SJ_2S-TRACE]  151.13,30.99 0 bottom
SJ13  RSSI  [SJ_2S-TRACE]  214.63,30.99 180 bottom
SJ14  RSSI  [SJ_2S-TRACE]  218.44,10.67 180 bottom
SJ15  RSSI  [SJ_2S-TRACE]  210.82,10.67 0 bottom
SJ16  RSSI  [SJ_2S-TRACE]  208.28,30.99 0 bottom
SJ17  RSSI  [SJ_2S-TRACE]  43.18,59.44 180 bottom
SJ18  RSSI  [SJ_2S-TRACE]  46.99,39.12 180 bottom
SJ19  RSSI  [SJ_2S-TRACE]  39.37,39.12 0 bottom
SJ20  RSSI  [SJ_2S-TRACE]  36.83,59.44 0 bottom
SJ21  RSSI  [SJ_2S-TRACE]  100.33,59.44 180 bottom
SJ22  RSSI  [SJ_2S-TRACE]  104.14,39.12 180 bottom
SJ23  RSSI  [SJ_2S-TRACE]  96.52,39.12 0 bottom
SJ24  RSSI  [SJ_2S-TRACE]  93.98,59.44 0 bottom
SJ25  RSSI  [SJ_2S-TRACE]  157.48,59.44 180 bottom
SJ26  RSSI  [SJ_2S-TRACE]  161.29,39.12 180 bottom
SJ27  RSSI  [SJ_2S-TRACE]  153.67,39.12 0 bottom
SJ28  RSSI  [SJ_2S-TRACE]  151.13,59.44 0 bottom
SJ29  RSSI  [SJ_2S-TRACE]  214.63,59.44 180 bottom
SJ30  RSSI  [SJ_2S-TRACE]  218.44,39.12 180 bottom
SJ31  RSSI  [SJ_2S-TRACE]  210.82,39.12 0 bottom
SJ32  RSSI  [SJ_2S-TRACE]  208.28,59.44 0 bottom
SJ33  RSSI  [SJ_2S-TRACE]  43.18,87.88 180 bottom
SJ34  RSSI  [SJ_2S-TRACE]  46.99,67.56 180 bottom
SJ35  RSSI  [SJ_2S-TRACE]  39.37,67.56 0 bottom
SJ36  RSSI  [SJ_2S-TRACE]  36.83,87.88 0 bottom
SJ37  RSSI  [SJ_2S-TRACE]  100.33,87.88 180 bottom
SJ38  RSSI  [SJ_2S-TRACE]  104.14,67.56 180 bottom
SJ39  RSSI  [SJ_2S-TRACE]  96.52,67.56 0 bottom
SJ40  RSSI  [SJ_2S-TRACE]  93.98,87.88 0 bottom
SJ41  RSSI  [SJ_2S-TRACE]  157.48,87.88 180 bottom
SJ42  RSSI  [SJ_2S-TRACE]  161.29,67.56 180 bottom
SJ43  RSSI  [SJ_2S-TRACE]  153.67,67.56 0 bottom
SJ44  RSSI  [SJ_2S-TRACE]  151.13,87.88 0 bottom
SJ45  RSSI  [SJ_2S-TRACE]  214.63,87.88 180 bottom
SJ46  RSSI  [SJ_2S-TRACE]  218.44,67.56 180 bottom
SJ47  RSSI  [SJ_2S-TRACE]  210.82,67.56 0 bottom
SJ48  RSSI  [SJ_2S-TRACE]  208.28,87.88 0 bottom
SJ49  RSSI  [SJ_2S-TRACE]  43.18,116.33 180 bottom
SJ50  RSSI  [SJ_2S-TRACE]  46.99,96.01 180 bottom
SJ51  RSSI  [SJ_2S-TRACE]  39.37,96.01 0 bottom
SJ52  RSSI  [SJ_2S-TRACE]  36.83,116.33 0 bottom
SJ53  RSSI  [SJ_2S-TRACE]  100.33,116.33 180 bottom
SJ54  RSSI  [SJ_2S-TRACE]  104.14,96.01 180 bottom
SJ55  RSSI  [SJ_2S-TRACE]  96.52,96.01 0 bottom
SJ56  RSSI  [SJ_2S-TRACE]  93.98,116.33 0 bottom
SJ57  RSSI  [SJ_2S-TRACE]  157.48,116.33 180 bottom
SJ58  RSSI  [SJ_2S-TRACE]  161.29,96.01 180 bottom
SJ59  RSSI  [SJ_2S-TRACE]  153.67,96.01 0 bottom
SJ60  RSSI  [SJ_2S-TRACE]  151.13,116.33 0 bottom
SJ61  RSSI  [SJ_2S-TRACE]  214.63,116.33 180 bottom
SJ62  RSSI  [SJ_2S-TRACE]  218.44,96.01 180 bottom
SJ63  RSSI  [SJ_2S-TRACE]  210.82,96.01 0 bottom
SJ64  RSSI  [SJ_2S-TRACE]  208.28,116.33 0 bottom
SJ65  RSSI  [SJ_2S-TRACE]  43.18,144.78 180 bottom
SJ66  RSSI  [SJ_2S-TRACE]  46.99,124.46 180 bottom
SJ67  RSSI  [SJ_2S-TRACE]  39.37,124.46 0 bottom
SJ68  RSSI  [SJ_2S-TRACE]  36.83,144.78 0 bottom
SJ69  RSSI  [SJ_2S-TRACE]  100.33,144.78 180 bottom
SJ70  RSSI  [SJ_2S-TRACE]  104.14,124.46 180 bottom
SJ71  RSSI  [SJ_2S-TRACE]  96.52,124.46 0 bottom
SJ72  RSSI  [SJ_2S-TRACE]  93.98,144.78 0 bottom
SJ73  RSSI  [SJ_2S-TRACE]  157.48,144.78 180 bottom
SJ74  RSSI  [SJ_2S-TRACE]  161.29,124.46 180 bottom
SJ75  RSSI  [SJ_2S-TRACE]  153.67,124.46 0 bottom
SJ76  RSSI  [SJ_2S-TRACE]  151.13,144.78 0 bottom
SJ77  RSSI  [SJ_2S-TRACE]  214.63,144.78 180 bottom
SJ78  RSSI  [SJ_2S-TRACE]  218.44,124.46 180 bottom
SJ79  RSSI  [SJ_2S-TRACE]  210.82,124.46 0 bottom
SJ80  RSSI  [SJ_2S-TRACE]  208.28,144.78 0 bottom
U1  MIC5205 3.3V  [SOT23-5]  111.76,23.37 270 top
U2  XBEE-1B3  [XBEE-SMD]  34.29,20.83 270 top
U3  MIC5205 3.3V  [SOT23-5]  54.61,23.37 270 top
U4  FT231XS  [SSOP20_L]  45.72,20.83 180 top
U5  FT231XS  [SSOP20_L]  102.87,20.83 180 top
U6  XBEE-1B3  [XBEE-SMD]  91.44,20.83 270 top
U7  MIC5205 3.3V  [SOT23-5]  168.91,23.37 270 top
U8  FT231XS  [SSOP20_L]  160.02,20.83 180 top
U9  XBEE-1B3  [XBEE-SMD]  148.59,20.83 270 top
U10  MIC5205 3.3V  [SOT23-5]  226.06,23.37 270 top
U11  FT231XS  [SSOP20_L]  217.17,20.83 180 top
U12  XBEE-1B3  [XBEE-SMD]  205.74,20.83 270 top
U13  MIC5205 3.3V  [SOT23-5]  54.61,51.82 270 top
U14  FT231XS  [SSOP20_L]  45.72,49.28 180 top
U15  XBEE-1B3  [XBEE-SMD]  34.29,49.28 270 top
U16  MIC5205 3.3V  [SOT23-5]  111.76,51.82 270 top
U17  FT231XS  [SSOP20_L]  102.87,49.28 180 top
U18  XBEE-1B3  [XBEE-SMD]  91.44,49.28 270 top
U19  MIC5205 3.3V  [SOT23-5]  168.91,51.82 270 top
U20  FT231XS  [SSOP20_L]  160.02,49.28 180 top
U21  XBEE-1B3  [XBEE-SMD]  148.59,49.28 270 top
U22  MIC5205 3.3V  [SOT23-5]  226.06,51.82 270 top
U23  FT231XS  [SSOP20_L]  217.17,49.28 180 top
U24  XBEE-1B3  [XBEE-SMD]  205.74,49.28 270 top
U25  MIC5205 3.3V  [SOT23-5]  54.61,80.26 270 top
U26  FT231XS  [SSOP20_L]  45.72,77.72 180 top
U27  XBEE-1B3  [XBEE-SMD]  34.29,77.72 270 top
U28  MIC5205 3.3V  [SOT23-5]  111.76,80.26 270 top
U29  FT231XS  [SSOP20_L]  102.87,77.72 180 top
U30  XBEE-1B3  [XBEE-SMD]  91.44,77.72 270 top
U31  MIC5205 3.3V  [SOT23-5]  168.91,80.26 270 top
U32  FT231XS  [SSOP20_L]  160.02,77.72 180 top
U33  XBEE-1B3  [XBEE-SMD]  148.59,77.72 270 top
U34  MIC5205 3.3V  [SOT23-5]  226.06,80.26 270 top
U35  FT231XS  [SSOP20_L]  217.17,77.72 180 top
U36  XBEE-1B3  [XBEE-SMD]  205.74,77.72 270 top
U37  MIC5205 3.3V  [SOT23-5]  54.61,108.71 270 top
U38  FT231XS  [SSOP20_L]  45.72,106.17 180 top
U39  XBEE-1B3  [XBEE-SMD]  34.29,106.17 270 top
U40  MIC5205 3.3V  [SOT23-5]  111.76,108.71 270 top
U41  FT231XS  [SSOP20_L]  102.87,106.17 180 top
U42  XBEE-1B3  [XBEE-SMD]  91.44,106.17 270 top
U43  MIC5205 3.3V  [SOT23-5]  168.91,108.71 270 top
U44  FT231XS  [SSOP20_L]  160.02,106.17 180 top
U45  XBEE-1B3  [XBEE-SMD]  148.59,106.17 270 top
U46  MIC5205 3.3V  [SOT23-5]  226.06,108.71 270 top
U47  FT231XS  [SSOP20_L]  217.17,106.17 180 top
U48  XBEE-1B3  [XBEE-SMD]  205.74,106.17 270 top
U49  MIC5205 3.3V  [SOT23-5]  54.61,137.16 270 top
U50  FT231XS  [SSOP20_L]  45.72,134.62 180 top
U51  XBEE-1B3  [XBEE-SMD]  34.29,134.62 270 top
U52  MIC5205 3.3V  [SOT23-5]  111.76,137.16 270 top
U53  FT231XS  [SSOP20_L]  102.87,134.62 180 top
U54  XBEE-1B3  [XBEE-SMD]  91.44,134.62 270 top
U55  MIC5205 3.3V  [SOT23-5]  168.91,137.16 270 top
U56  FT231XS  [SSOP20_L]  160.02,134.62 180 top
U57  XBEE-1B3  [XBEE-SMD]  148.59,134.62 270 top
U58  MIC5205 3.3V  [SOT23-5]  226.06,137.16 270 top
U59  FT231XS  [SSOP20_L]  217.17,134.62 180 top
U60  XBEE-1B3  [XBEE-SMD]  205.74,134.62 270 top
U$1  LOGO-SFESK  [SFE-LOGO-FLAME]  30.73,8 0 top
U$2  LOGO-SFESK  [SFE-LOGO-FLAME]  87.88,8 0 top
U$3  LOGO-SFENEW  [SFE-NEW-WEBLOGO]  112.01,18.67 0 bottom
U$4  LOGO-SFENEW  [SFE-NEW-WEBLOGO]  54.86,18.67 0 bottom
U$5  STAND-OFF  [STAND-OFF]  25.4,9.4 0 top
U$6  STAND-OFF  [STAND-OFF]  82.55,9.4 0 top
U$7  OSHW-LOGOS  [OSHW-LOGO-S]  31.75,32.26 0 top
U$8  OSHW-LOGOS  [OSHW-LOGO-S]  33.02,20.83 0 bottom
U$9  STAND-OFF  [STAND-OFF]  25.4,32.26 0 top
U$10  STAND-OFF  [STAND-OFF]  60.96,32.26 0 top
U$11  STAND-OFF  [STAND-OFF]  60.96,9.4 0 top
U$12  STAND-OFF  [STAND-OFF]  82.55,32.26 0 top
U$13  STAND-OFF  [STAND-OFF]  118.11,32.26 0 top
U$14  STAND-OFF  [STAND-OFF]  118.11,9.4 0 top
U$15  OSHW-LOGOS  [OSHW-LOGO-S]  90.17,20.83 0 bottom
U$16  OSHW-LOGOS  [OSHW-LOGO-S]  88.9,32.26 0 top
U$17  LOGO-SFESK  [SFE-LOGO-FLAME]  145.03,8 0 top
U$18  LOGO-SFENEW  [SFE-NEW-WEBLOGO]  169.16,18.67 0 bottom
U$19  STAND-OFF  [STAND-OFF]  139.7,9.4 0 top
U$20  STAND-OFF  [STAND-OFF]  139.7,32.26 0 top
U$21  STAND-OFF  [STAND-OFF]  175.26,32.26 0 top
U$22  STAND-OFF  [STAND-OFF]  175.26,9.4 0 top
U$23  OSHW-LOGOS  [OSHW-LOGO-S]  147.32,20.83 0 bottom
U$24  OSHW-LOGOS  [OSHW-LOGO-S]  146.05,32.26 0 top
U$25  LOGO-SFESK  [SFE-LOGO-FLAME]  202.18,8 0 top
U$26  LOGO-SFENEW  [SFE-NEW-WEBLOGO]  226.31,18.67 0 bottom
U$27  STAND-OFF  [STAND-OFF]  196.85,9.4 0 top
U$28  STAND-OFF  [STAND-OFF]  196.85,32.26 0 top
U$29  STAND-OFF  [STAND-OFF]  232.41,32.26 0 top
U$30  STAND-OFF  [STAND-OFF]  232.41,9.4 0 top
U$31  OSHW-LOGOS  [OSHW-LOGO-S]  204.47,20.83 0 bottom
U$32  OSHW-LOGOS  [OSHW-LOGO-S]  203.2,32.26 0 top
U$33  LOGO-SFESK  [SFE-LOGO-FLAME]  30.73,36.45 0 top
U$34  LOGO-SFENEW  [SFE-NEW-WEBLOGO]  54.86,47.12 0 bottom
U$35  STAND-OFF  [STAND-OFF]  25.4,37.85 0 top
U$36  STAND-OFF  [STAND-OFF]  25.4,60.71 0 top
U$37  STAND-OFF  [STAND-OFF]  60.96,60.71 0 top
U$38  STAND-OFF  [STAND-OFF]  60.96,37.85 0 top
U$39  OSHW-LOGOS  [OSHW-LOGO-S]  33.02,49.28 0 bottom
U$40  OSHW-LOGOS  [OSHW-LOGO-S]  31.75,60.71 0 top
U$41  LOGO-SFESK  [SFE-LOGO-FLAME]  87.88,36.45 0 top
U$42  LOGO-SFENEW  [SFE-NEW-WEBLOGO]  112.01,47.12 0 bottom
U$43  STAND-OFF  [STAND-OFF]  82.55,37.85 0 top
U$44  STAND-OFF  [STAND-OFF]  82.55,60.71 0 top
U$45  STAND-OFF  [STAND-OFF]  118.11,60.71 0 top
U$46  STAND-OFF  [STAND-OFF]  118.11,37.85 0 top
U$47  OSHW-LOGOS  [OSHW-LOGO-S]  90.17,49.28 0 bottom
U$48  OSHW-LOGOS  [OSHW-LOGO-S]  88.9,60.71 0 top
U$49  LOGO-SFESK  [SFE-LOGO-FLAME]  145.03,36.45 0 top
U$50  LOGO-SFENEW  [SFE-NEW-WEBLOGO]  169.16,47.12 0 bottom
U$51  STAND-OFF  [STAND-OFF]  139.7,37.85 0 top
U$52  STAND-OFF  [STAND-OFF]  139.7,60.71 0 top
U$53  STAND-OFF  [STAND-OFF]  175.26,60.71 0 top
U$54  STAND-OFF  [STAND-OFF]  175.26,37.85 0 top
U$55  OSHW-LOGOS  [OSHW-LOGO-S]  147.32,49.28 0 bottom
U$56  OSHW-LOGOS  [OSHW-LOGO-S]  146.05,60.71 0 top
U$57  LOGO-SFESK  [SFE-LOGO-FLAME]  202.18,36.45 0 top
U$58  LOGO-SFENEW  [SFE-NEW-WEBLOGO]  226.31,47.12 0 bottom
U$59  STAND-OFF  [STAND-OFF]  196.85,37.85 0 top
U$60  STAND-OFF  [STAND-OFF]  196.85,60.71 0 top
U$61  STAND-OFF  [STAND-OFF]  232.41,60.71 0 top
U$62  STAND-OFF  [STAND-OFF]  232.41,37.85 0 top
U$63  OSHW-LOGOS  [OSHW-LOGO-S]  204.47,49.28 0 bottom
U$64  OSHW-LOGOS  [OSHW-LOGO-S]  203.2,60.71 0 top
U$65  LOGO-SFESK  [SFE-LOGO-FLAME]  30.73,64.9 0 top
U$66  LOGO-SFENEW  [SFE-NEW-WEBLOGO]  54.86,75.56 0 bottom
U$67  STAND-OFF  [STAND-OFF]  25.4,66.29 0 top
U$68  STAND-OFF  [STAND-OFF]  25.4,89.15 0 top
U$69  STAND-OFF  [STAND-OFF]  60.96,89.15 0 top
U$70  STAND-OFF  [STAND-OFF]  60.96,66.29 0 top
U$71  OSHW-LOGOS  [OSHW-LOGO-S]  33.02,77.72 0 bottom
U$72  OSHW-LOGOS  [OSHW-LOGO-S]  31.75,89.15 0 top
U$73  LOGO-SFESK  [SFE-LOGO-FLAME]  87.88,64.9 0 top
U$74  LOGO-SFENEW  [SFE-NEW-WEBLOGO]  112.01,75.56 0 bottom
U$75  STAND-OFF  [STAND-OFF]  82.55,66.29 0 top
U$76  STAND-OFF  [STAND-OFF]  82.55,89.15 0 top
U$77  STAND-OFF  [STAND-OFF]  118.11,89.15 0 top
U$78  STAND-OFF  [STAND-OFF]  118.11,66.29 0 top
U$79  OSHW-LOGOS  [OSHW-LOGO-S]  90.17,77.72 0 bottom
U$80  OSHW-LOGOS  [OSHW-LOGO-S]  88.9,89.15 0 top
U$81  LOGO-SFESK  [SFE-LOGO-FLAME]  145.03,64.9 0 top
U$82  LOGO-SFENEW  [SFE-NEW-WEBLOGO]  169.16,75.56 0 bottom
U$83  STAND-OFF  [STAND-OFF]  139.7,66.29 0 top
U$84  STAND-OFF  [STAND-OFF]  139.7,89.15 0 top
U$85  STAND-OFF  [STAND-OFF]  175.26,89.15 0 top
U$86  STAND-OFF  [STAND-OFF]  175.26,66.29 0 top
U$87  OSHW-LOGOS  [OSHW-LOGO-S]  147.32,77.72 0 bottom
U$88  OSHW-LOGOS  [OSHW-LOGO-S]  146.05,89.15 0 top
U$89  LOGO-SFESK  [SFE-LOGO-FLAME]  202.18,64.9 0 top
U$90  LOGO-SFENEW  [SFE-NEW-WEBLOGO]  226.31,75.56 0 bottom
U$91  STAND-OFF  [STAND-OFF]  196.85,66.29 0 top
U$92  STAND-OFF  [STAND-OFF]  196.85,89.15 0 top
U$93  STAND-OFF  [STAND-OFF]  232.41,89.15 0 top
U$94  STAND-OFF  [STAND-OFF]  232.41,66.29 0 top
U$95  OSHW-LOGOS  [OSHW-LOGO-S]  204.47,77.72 0 bottom
U$96  OSHW-LOGOS  [OSHW-LOGO-S]  203.2,89.15 0 top
U$97  LOGO-SFESK  [SFE-LOGO-FLAME]  30.73,93.34 0 top
U$98  LOGO-SFENEW  [SFE-NEW-WEBLOGO]  54.86,104.01 0 bottom
U$99  STAND-OFF  [STAND-OFF]  25.4,94.74 0 top
U$100  STAND-OFF  [STAND-OFF]  25.4,117.6 0 top
U$101  STAND-OFF  [STAND-OFF]  60.96,117.6 0 top
U$102  STAND-OFF  [STAND-OFF]  60.96,94.74 0 top
U$103  OSHW-LOGOS  [OSHW-LOGO-S]  33.02,106.17 0 bottom
U$104  OSHW-LOGOS  [OSHW-LOGO-S]  31.75,117.6 0 top
U$105  LOGO-SFESK  [SFE-LOGO-FLAME]  87.88,93.34 0 top
U$106  LOGO-SFENEW  [SFE-NEW-WEBLOGO]  112.01,104.01 0 bottom
U$107  STAND-OFF  [STAND-OFF]  82.55,94.74 0 top
U$108  STAND-OFF  [STAND-OFF]  82.55,117.6 0 top
U$109  STAND-OFF  [STAND-OFF]  118.11,117.6 0 top
U$110  STAND-OFF  [STAND-OFF]  118.11,94.74 0 top
U$111  OSHW-LOGOS  [OSHW-LOGO-S]  90.17,106.17 0 bottom
U$112  OSHW-LOGOS  [OSHW-LOGO-S]  88.9,117.6 0 top
U$113  LOGO-SFESK  [SFE-LOGO-FLAME]  145.03,93.34 0 top
U$114  LOGO-SFENEW  [SFE-NEW-WEBLOGO]  169.16,104.01 0 bottom
U$115  STAND-OFF  [STAND-OFF]  139.7,94.74 0 top
U$116  STAND-OFF  [STAND-OFF]  139.7,117.6 0 top
U$117  STAND-OFF  [STAND-OFF]  175.26,117.6 0 top
U$118  STAND-OFF  [STAND-OFF]  175.26,94.74 0 top
U$119  OSHW-LOGOS  [OSHW-LOGO-S]  147.32,106.17 0 bottom
U$120  OSHW-LOGOS  [OSHW-LOGO-S]  146.05,117.6 0 top
U$121  LOGO-SFESK  [SFE-LOGO-FLAME]  202.18,93.34 0 top
U$122  LOGO-SFENEW  [SFE-NEW-WEBLOGO]  226.31,104.01 0 bottom
U$123  STAND-OFF  [STAND-OFF]  196.85,94.74 0 top
U$124  STAND-OFF  [STAND-OFF]  196.85,117.6 0 top
U$125  STAND-OFF  [STAND-OFF]  232.41,117.6 0 top
U$126  STAND-OFF  [STAND-OFF]  232.41,94.74 0 top
U$127  OSHW-LOGOS  [OSHW-LOGO-S]  204.47,106.17 0 bottom
U$128  OSHW-LOGOS  [OSHW-LOGO-S]  203.2,117.6 0 top
U$129  LOGO-SFESK  [SFE-LOGO-FLAME]  30.73,121.79 0 top
U$130  LOGO-SFENEW  [SFE-NEW-WEBLOGO]  54.86,132.46 0 bottom
U$131  STAND-OFF  [STAND-OFF]  25.4,123.19 0 top
U$132  STAND-OFF  [STAND-OFF]  25.4,146.05 0 top
U$133  STAND-OFF  [STAND-OFF]  60.96,146.05 0 top
U$134  STAND-OFF  [STAND-OFF]  60.96,123.19 0 top
U$135  OSHW-LOGOS  [OSHW-LOGO-S]  33.02,134.62 0 bottom
U$136  OSHW-LOGOS  [OSHW-LOGO-S]  31.75,146.05 0 top
U$137  LOGO-SFESK  [SFE-LOGO-FLAME]  87.88,121.79 0 top
U$138  LOGO-SFENEW  [SFE-NEW-WEBLOGO]  112.01,132.46 0 bottom
U$139  STAND-OFF  [STAND-OFF]  82.55,123.19 0 top
U$140  STAND-OFF  [STAND-OFF]  82.55,146.05 0 top
U$141  STAND-OFF  [STAND-OFF]  118.11,146.05 0 top
U$142  STAND-OFF  [STAND-OFF]  118.11,123.19 0 top
U$143  OSHW-LOGOS  [OSHW-LOGO-S]  90.17,134.62 0 bottom
U$144  OSHW-LOGOS  [OSHW-LOGO-S]  88.9,146.05 0 top
U$145  LOGO-SFESK  [SFE-LOGO-FLAME]  145.03,121.79 0 top
U$146  LOGO-SFENEW  [SFE-NEW-WEBLOGO]  169.16,132.46 0 bottom
U$147  STAND-OFF  [STAND-OFF]  139.7,123.19 0 top
U$148  STAND-OFF  [STAND-OFF]  139.7,146.05 0 top
U$149  STAND-OFF  [STAND-OFF]  175.26,146.05 0 top
U$150  STAND-OFF  [STAND-OFF]  175.26,123.19 0 top
U$151  OSHW-LOGOS  [OSHW-LOGO-S]  147.32,134.62 0 bottom
U$152  OSHW-LOGOS  [OSHW-LOGO-S]  146.05,146.05 0 top
U$153  LOGO-SFESK  [SFE-LOGO-FLAME]  202.18,121.79 0 top
U$154  LOGO-SFENEW  [SFE-NEW-WEBLOGO]  226.31,132.46 0 bottom
U$155  STAND-OFF  [STAND-OFF]  196.85,123.19 0 top
U$156  STAND-OFF  [STAND-OFF]  196.85,146.05 0 top
U$157  STAND-OFF  [STAND-OFF]  232.41,146.05 0 top
U$158  STAND-OFF  [STAND-OFF]  232.41,123.19 0 top
U$159  OSHW-LOGOS  [OSHW-LOGO-S]  204.47,134.62 0 bottom
U$160  OSHW-LOGOS  [OSHW-LOGO-S]  203.2,146.05 0 top

## Library data of the parts
C1-C120 JP2-JP5 JP7 JP8 JP10 JP11 JP13 JP14 JP16 JP17 JP19 JP20 JP22 JP23 JP25 JP26 JP28 JP29 JP31 JP32 JP34 JP35 JP37 JP38 JP40 JP41 JP43 JP44 JP46 JP47 JP49 JP50 JP52 JP53 JP55 JP56 JP58 JP59 R1-R120 U1 U3 U7 U10 U13 U16 U19 U22 U25 U28 U31 U34 U37 U40 U43 U46 U49 U52 U55 U58 U$1-U$160 = SparkFun
D1 D4 D5 D8 D9 D12 D13 D16 D17 D20 D21 D24 D25 D28 D29 D32 D33 D36 D37 D40 D41 D44 D45 D48 D49 D52 D53 D56 D57 D60 D61 D64 D65 D68 D69 D72 D73 D76 D77 D80 = SparkFun-LED; PROD_ID: DIO-00819
D2 D3 D6 D7 D10 D11 D14 D15 D18 D19 D22 D23 D26 D27 D30 D31 D34 D35 D38 D39 D42 D43 D46 D47 D50 D51 D54 D55 D58 D59 D62 D63 D66 D67 D70 D71 D74 D75 D78 D79 = SparkFun-LED; PROD_ID: DIO-00821
E$1 = SparkFun-Retired
E$6 E$8 FID1-FID40 = SparkFun-Aesthetics
JP1 JP6 JP9 JP12 JP15 JP18 JP21 JP24 JP27 JP30 JP33 JP36 JP39 JP42 JP45 JP48 JP51 JP54 JP57 JP60 = SparkFun-Connectors
S1-S20 = SparkFun-Electromechanical; PROD_ID: SWCH-08247
SJ1-SJ80 = SparkFun-Passives
U2 U6 U9 U12 U15 U18 U21 U24 U27 U30 U33 U36 U39 U42 U45 U48 U51 U54 U57 U60 = SparkFun-RF; PROD_ID: CONN-09042
U4 U5 U8 U11 U14 U17 U20 U23 U26 U29 U32 U35 U38 U41 U44 U47 U50 U53 U56 U59 = SparkFun-DigitalIC